# Altium PCB max17320g_2.PcbDoc
Units mil, origin at the board's own origin, x right, y up, seen from the top; angles counter-clockwise.
Board outline 2362.2 x 1166.1 mil, 2 copper layers (Top Layer, Bottom Layer); 58 components, 39 nets, 159 pads, 302 vias.
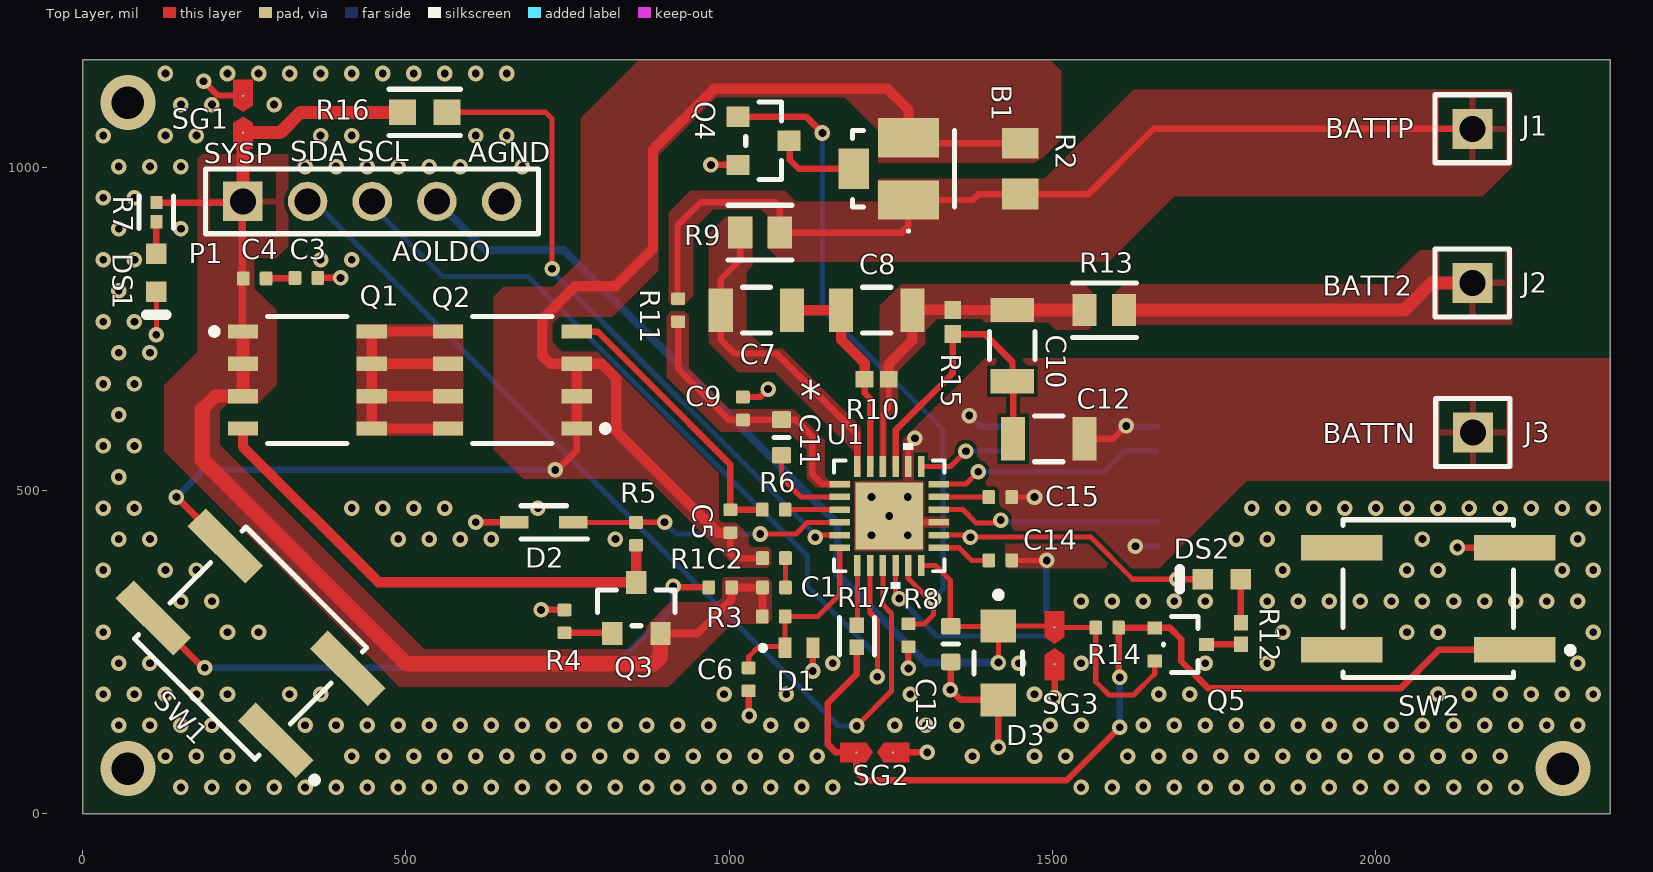
[diagram p0: Top Layer view]
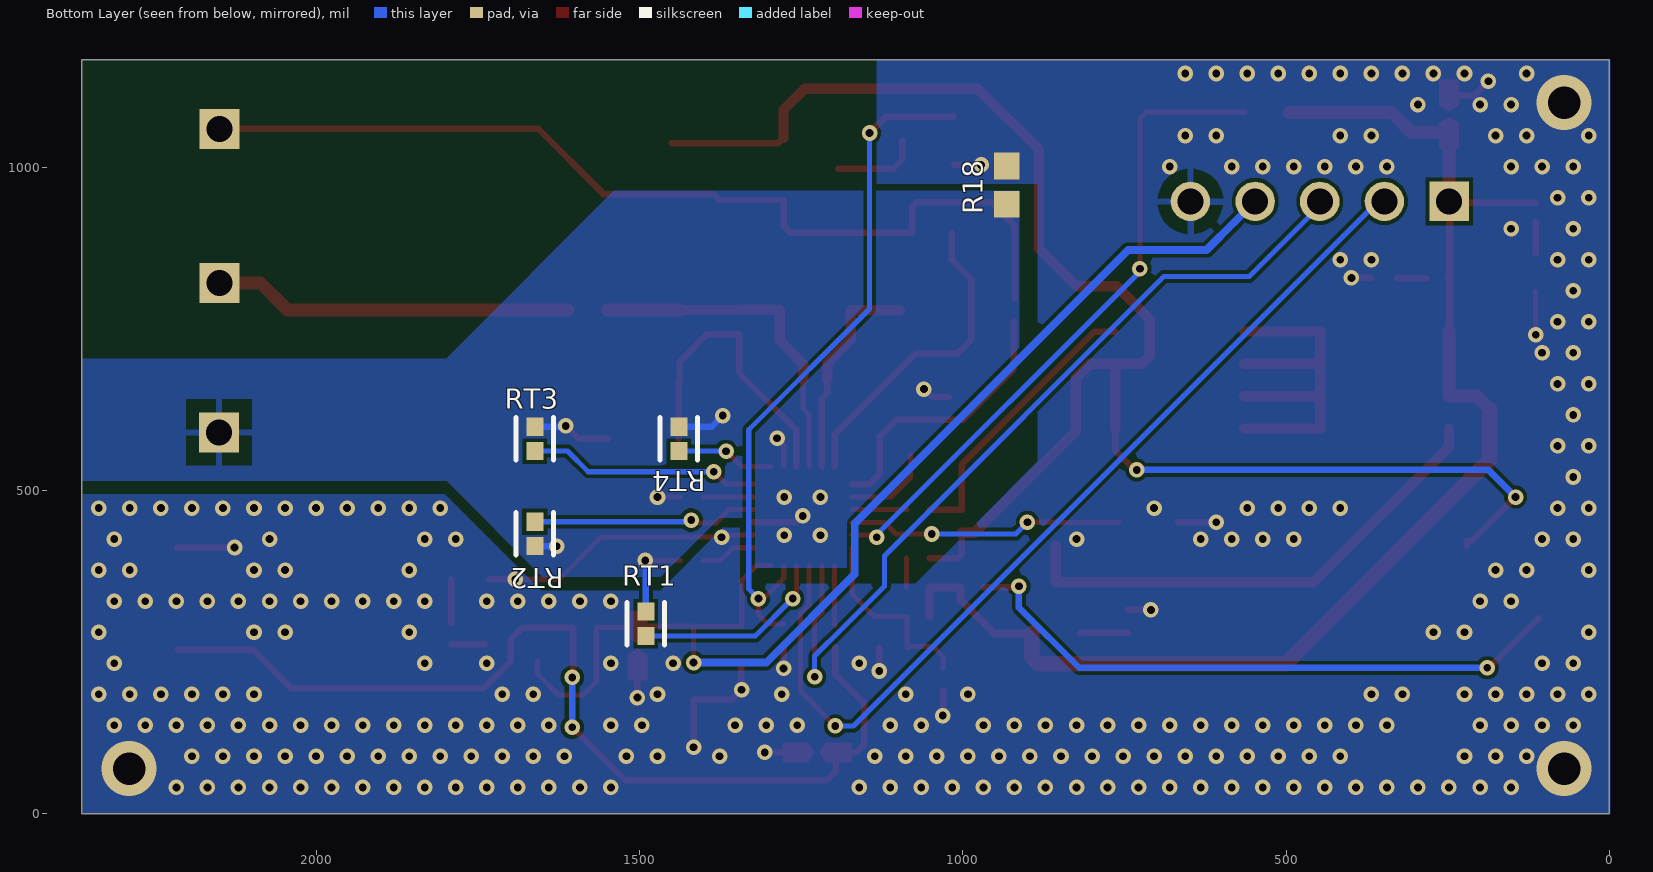
[diagram p1: Bottom Layer view, seen from below]
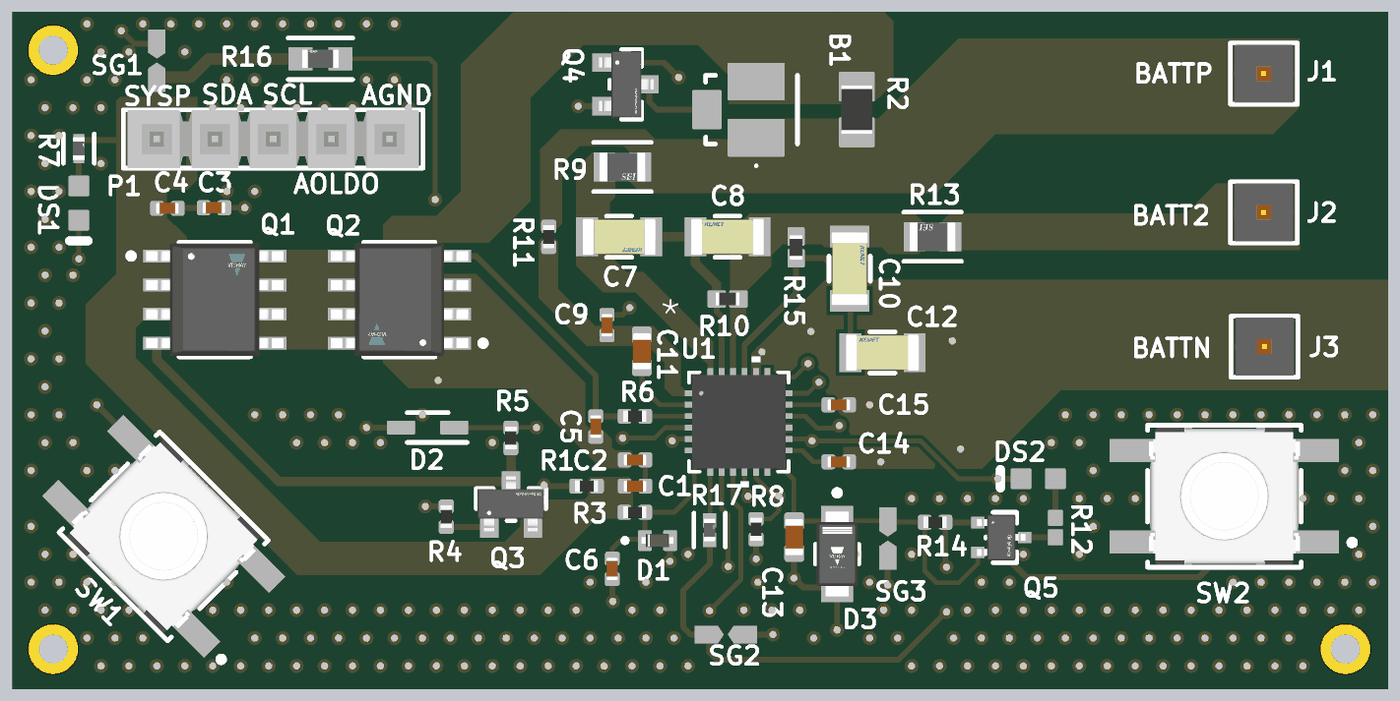
[diagram p2: 3D render of the assembled board from above, using the file's embedded part models]
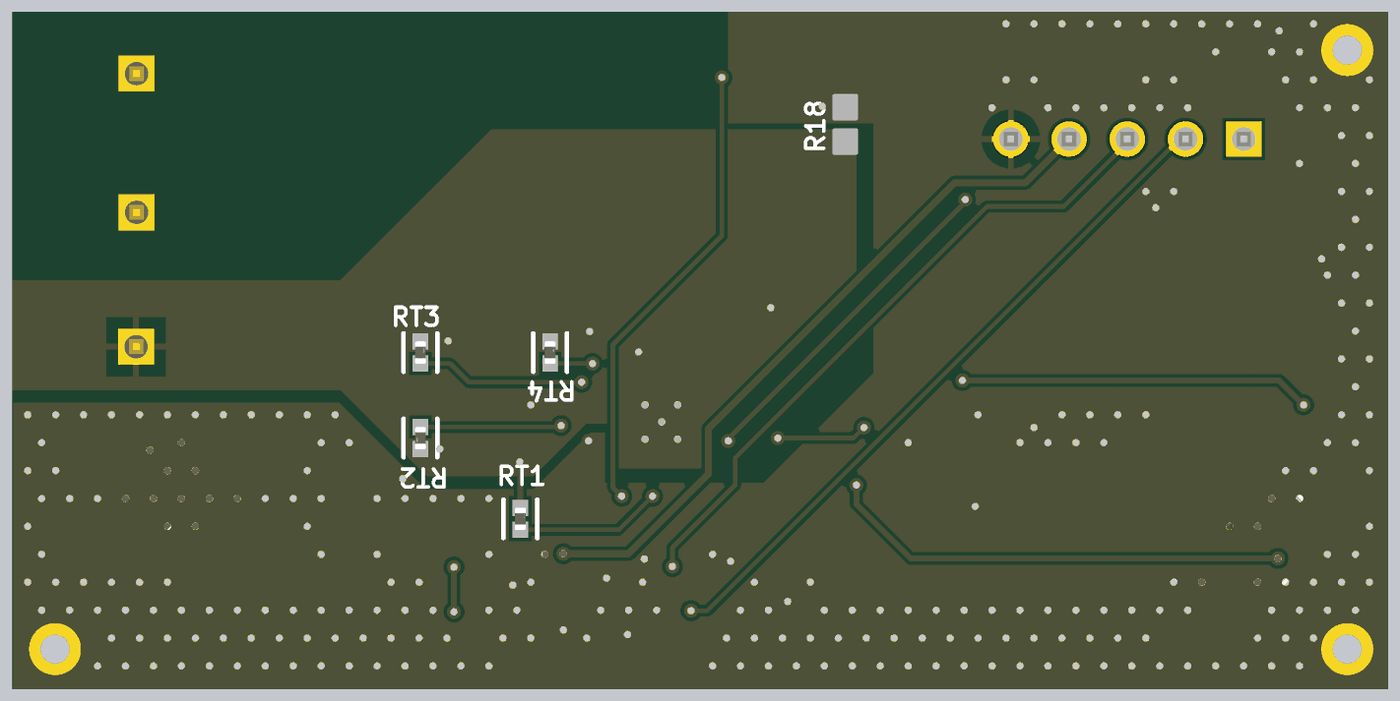
[diagram p3: 3D render of the assembled board from below, using the file's embedded part models]

## Layer stack, top to bottom
Top Solder: solder mask 0.4, Solder Resist, Dk 3.5
Top Layer: signal copper 1.4
Dielectric 1: dielectric 12.6, FR-4, Dk 4.8
Bottom Layer: signal copper 1.4
Bottom Solder: solder mask 0.4, Solder Resist, Dk 3.5

## Board outline
0,0 2362.2,0 2362.2,1166.1 0,1166.1

## Design rules (kind name [scope] priority, off if disabled: settings)
Clearance [All] p1: gap=6 ignorepadtopadclearanceinfootprint=TRUE
HoleSize [All] p1: absolutevalues=TRUE maxlimit=100 minlimit=10 maxpercent=80.000 minpercent=20.000
HoleToHoleClearance [All] p1: gap=12 allowstackedmicrovias=TRUE
MinimumSolderMaskSliver [All] p1: minsoldermaskwidth=5
PasteMaskExpansion [All] p1: expansion=2
PlaneClearance [All] p1: clearance=0
PlaneConnect [All] p1: planeconnectstyle=Direct reliefexpansion=20 reliefentries=4 reliefconductorwidth=10 reliefairgap=10
PolygonConnect [All] p1: thpad.connectstyle=Relief thpad.reliefconductorwidth=10 thpad.reliefentries=4 thpad.polygonreliefangle="90 Angle" thpad.airgapwidth=20 smdpad.connectstyle=Direct smdpad.reliefconductorwidth=10 smdpad.reliefentries=4 smdpad.polygonreliefangle="90 Angle" smdpad.airgapwidth=20 via.connectstyle=Direct via.reliefconductorwidth=10 via.reliefentries=4 via.polygonreliefangle="90 Angle" via.airgapwidth=20
RoutingCorners [All] p1: cornerstyle=45-Degree minsetback=6 maxsetback=6
RoutingVias [All] p1: holewidth=12 width=24 viastyle="Through Hole" minholewidth=12 minwidth=24 maxholewidth=200 maxwidth=500
SilkToSilkClearance [All] p1: silktosilkclearance=1
SolderMaskExpansion [All] p1: expansion=2 istentingtop=FALSE
SupplyNets "Schematic Supply Nets_1" [InNet('AGND')] p1: voltage=0.000
SupplyNets "Schematic Supply Nets_4" [InNet('BATTN')] p2: voltage=0.000
UnRoutedNet [All] p1: checkbadconnections=TRUE
UnpouredPolygon [All] p1: allowunpoured=TRUE allowshelved=TRUE
Width [All] p1: maxlimit=50 minlimit=8 preferedwidth=8
20 further rules are at their usual default settings.

## Components (designator, comment, footprint, x,y, rotation, side; value= is the part's Value field where it differs from the comment)
B1 "ITV4030L0812NR" ITV4030L0812NR 1277.12,997.61 r0 top
C1 "Capacitor 100nF +/-20% 25V 0402" CAPC0402(1005)60_L 1069.12,350.21 r0 top value="100nF 25V"
C2 "Capacitor 100nF +/-20% 25V 0402" CAPC0402(1005)60_L 1069.11,395.49 r180 top value="100nF 25V"
C3 "Capacitor 100nF +/-20% 25V 0402" CAPC0402(1005)60_L 346,829 r180 top value="100nF 25V"
C4 "Capacitor 100nF +/-20% 25V 0402" CAPC0402(1005)60_L 266,828 r180 top value="100n 25V"
C5 "Capacitor 100nF +/-20% 10V 0402" CAPC0402(1005)60_L 1001.65,452.71 r270 top value="100nF 10V"
C6 "Capacitor 10nF +/-20% 50V 0402" CAPC0402(1005)60_L 1030,208 r90 top value="10nF 50V"
C7 "0.01uF" FP-C1206C-EB-MFG 1041.83,779 r180 top value="10,000 pF"
C8 "0.01uF" FP-C1206C-EB-MFG 1228,779 r0 top value="10,000 pF"
C9 "Capacitor 100nF +/-20% 25V 0402" CAPC0402(1005)60_L 1021,627 r90 top value=100nF
C10 "0.01uF" FP-C1206C-EB-MFG 1437.62,724.24 r270 top value="10,000 pF"
C11 "Capacitor 470nF +/-20% 25V 0603" CAPC0603(1608)100_L 1080.85,582.21 r270 top value=470nF
C12 "0.01uF" FP-C1206C-EB-MFG 1494,580 r0 top value="10,000 pF"
C13 "Capacitor 470nF +/-20% 25V 0603" CAPC0603(1608)100_L 1342.47,262.65 r270 top value=470nF
C14 "Capacitor 470nF +/-40% 10V 0402" CAPC0402(1005)60_L 1419,392 r0 top value=470nF
C15 "Capacitor 470nF +/-40% 10V 0402" CAPC0402(1005)60_L 1419,490 r0 top value=470nF
D1 "RB520G-30_RLG" DIO_RB520G-30_RLG 1107.76,256.74 r0 top
D2 "SD101BWS-E3-18" SOD2713X115N 713,451 r180 top
D3 "BZD27C5V6P-E3-08" FP-S8-V-3915_01-001-MFG 1416.13,233.43 r90 top
DS1 "HSMG-C190" AVAG-HSMX-C190_V 114,837 r270 top
DS2 "LTST-C190KRKT" LTST-C191KRKT_V 1761.47,363 r180 top
J1 "TSW-101-07-L-S" FP-TSW-101-07-L-S-MFG 2149.02,1059.53 r0 top
J2 "TSW-101-07-L-S" FP-TSW-101-07-L-S-MFG 2149,821 r0 top
J3 "TSW-101-07-L-S" FP-TSW-101-07-L-S-MFG 2150,590 r0 top
P1 "TSW-105-05-L-S" SMTC-TSW-105-05-X-S 247.78,947.12 r0 top
Q1 "SI4420BDY-T1-E3" FP-C-06527-MFG 347.41,671 r0 top
Q2 "SI4420BDY-T1-E3" FP-C-06527-MFG 664.5,671 r180 top
Q3 "2N7002K" FP-318-08-MFG 856.19,318.49 r90 top
Q4 "2N7002K" FP-318-08-MFG 1053,1041 r0 top
Q5 "BSS223PWH6327XTSA1" FP-PG-SOT323-3-MFG 1698,262 r0 top
R1 "Resistor 1K +/-5 % 0402 63 mW" RESC0402(1005)_L 985.9,350.21 r0 top value=1k
R2 "Resistor 0R +/- 5% 0805 125 mW" RESC2013X60X35ML10T20 1450,998 r270 top locked value=0
R3 "Resistor 1K +/-5 % 0402 63 mW" RESC0402(1005)_L 1068.85,305.28 r0 top value=1k
R4 "Resistor 10K  +/-1 % 0402 63 mW" RESC0402(1005)_L 745,297.72 r270 top value=10k
R5 "Resistor 100R +/-1 % 0402 63 mW" RESC0402(1005)_L 856,433 r270 top value=100
R6 "Resistor 100R +/-1 % 0402 63 mW" RESC0402(1005)_L 1068.85,470.43 r0 top value=100
R7 "AC0402FR-07680KL" FP-AC0402-IPC_C 114,930.57 r90 top
R8 "Resistor 10K  +/-1 % 0402 63 mW" RESC0402(1005)_L 1277.12,276.21 r90 top value=10k
R9 "49.9Ω" FP-RMCF0805-IPC_C 1047.46,899 r0 top
R10 "Resistor 0R 0402 63 mW" RESC1005X40X25ML05T10 1228,672 r0 top value=0
R11 "Resistor 10R  +/-1 % 0402 63 mW" RESC0402(1005)_L 920.9,779 r90 top value=10
R12 "365Ω" RESC1005X40X25NL05T10 1791,279 r270 top
R13 "49.9Ω" FP-RMCF0805-IPC_C 1580,779 r180 top
R14 "Resistor 100K +/-1 % 0402 63 mW" RESC0402(1005)_L 1584.37,288.14 r180 top value=100k
R15 "Resistor 0R 0402 63 mW" RESC1005X40X25ML05T10 1345.63,760.76 r90 top value=0
R16 "AC0603FR-10330RL" FP-AC0603-IPC_A 528.95,1085 r180 top
R17 "150Ω" FP-AF0402-IPC_B 1197.31,274.75 r90 top
R18 "0.005" RESC1608X80N 932.13,972.37 r270 bottom
RT1 "NCU15XH103E6SRC" FP-NCP15-NCU15-0_05-IPC_A 1490,294 r90 bottom
RT2 "NCU15XH103E6SRC" FP-NCP15-NCU15-0_05-IPC_A 1661.57,433 r270 bottom
RT3 "NCU15XH103E6SRC" FP-NCP15-NCU15-0_05-IPC_A 1661.57,580 r90 bottom
RT4 "NCU15XH103E6SRC" FP-NCP15-NCU15-0_05-IPC_A 1438.88,580 r90 bottom
SG1 "SPARK GAP" EVKIT_SPARK_GAP 248,1082 r270 top
SG2 "SPARK GAP" EVKIT_SPARK_GAP 1225,95 r180 top
SG3 "SPARK GAP" EVKIT_SPARK_GAP 1503,260 r90 top
SW1 "EVQ-Q2K03W" FP-EVQ-Q2K03W-MFG 259.67,263.97 r135 top
SW2 "EVQ-Q2K03W" FP-EVQ-Q2K03W-MFG 2081.11,332.87 r180 top
U1 "MAX17320G20+" 21-0139I_T2444-4_MXM 1247.35,460.74 r0 top

## Footprints (in the part's own frame and the unit in brackets; to place one, negate y for a bottom-side part, rotate by r counter-clockwise, add the part's x,y. Pads: shape width x height; smd on the part's side, far side on the other; paste and mask are expansions set on the pad)
21-0139I_T2444-4_MXM [mil]
  rect 32x10 smd paste+0 mask+0: 1(-76.5,49.21) 2(-76.5,29.53) 3(-76.5,9.84) 4(-76.5,-9.84) 5(-76.5,-29.53) 6(-76.5,-49.21) 13(76.5,-49.21) 14(76.5,-29.53) 15(76.5,-9.84) 16(76.5,9.84) 17(76.5,29.53) 18(76.5,49.21)
  rect 10x32 smd paste+0 mask+0: 7(-49.21,-76.5) 8(-29.53,-76.5) 9(-9.84,-76.5) 10(9.84,-76.5) 11(29.53,-76.5) 12(49.21,-76.5) 19(49.21,76.5) 20(29.53,76.5) 21(9.84,76.5) 22(-9.84,76.5) 23(-29.53,76.5) 24(-49.21,76.5)
  rect 104x104 smd mask+0: 25(0,0)
  silkscreen extent -86,-112 86,112, body extent -81,-81 81,81, height 32
AVAG-HSMX-C190_V [mm] "SMD, 2-Leads, Body 1.6x0.8mm, Height 0.9mm"
  rect 0.8x0.8 smd: 1(-0.75,0) 2(0.75,0)
  silkscreen extent 1.65,-0.4 1.65,0.4, body extent -0.8,-0.4 0.8,0.4, height 0.9
CAPC0402(1005)60_L [mm] "Chip Capacitor, Body 1.0x0.5mm, Height 0.6mm, IPC High Density"
  rrect25% 0.5x0.55 smd: 1(-0.45,0) 2(0.45,0)
  body extent -0.5,-0.25 0.5,0.25, height 0.6
CAPC0603(1608)100_L [mm] "Chip Capacitor, Body 1.6x0.8mm, Height 1.0mm, IPC High Density"
  rrect25% 0.66x0.76 smd: 1(-0.7,0) 2(0.7,0)
  silkscreen extent 0,-0.3 0,0.3, body extent -0.8,-0.4 0.8,0.4, height 0.95
DIO_RB520G-30_RLG [mm]
  rect 0.5x0.8 smd: A(0.55,0) C(-0.55,0)
  silkscreen extent -1.52,-0.1 -1.32,0.1, body extent -0.7,-0.3 0.7,0.3, height 0.63
EVKIT_SPARK_GAP [mil]
  round 3 smd paste-1.5 mask-1.5: 1(-28.5,0) 2(28.5,0)
  Top Layer region: -13.5,-15 -53.5,-15 -53.5,15 -13.5,15 -3.5,0
  Top Layer region: 13.5,15 53.5,15 53.5,-15 13.5,-15 3.5,0
FP-318-08-MFG [mm]
  rect 0.9x0.8 smd paste+0 mask+0: 1(-1,0.95) 2(-1,-0.95) 3(1,0)
  silkscreen extent -0.7,-1.52 0.7,1.52, body extent -1.55,-1.62 1.55,1.62, height 0.25
FP-AC0402-IPC_C [mil]
  rect 20.29x18.6 smd paste+0 mask+0: 1(-14.9,0) 2(14.9,0)
  silkscreen extent -25,-27 25,27, body extent -29,-15 29,15, height 10
FP-AC0603-IPC_A [mil]
  rect 41.68x39.85 smd paste+0 mask+0: 1(-34.52,0) 2(34.52,0)
  silkscreen extent -55,-36 55,36, body extent -75,-40 75,40, height 10
FP-AF0402-IPC_B [mil]
  rect 24.23x22.54 smd paste+0 mask+0: 1(-16.87,0) 2(16.87,0)
  silkscreen extent -29,-27 29,27, body extent -35,-17 35,17, height 10
FP-C1206C-EB-MFG [mm]
  rect 0.95x1.7 smd paste+0 mask+0: 1(-1.4,0) 2(1.4,0)
  silkscreen extent -0.55,-0.9 0.55,0.9, body extent -2,-1 2,1, height 0.25
FP-C-06527-MFG [mil]
  rect 47x22 smd paste+0 mask+0: 1(-99.5,75) 2(-99.5,25) 3(-99.5,-25) 4(-99.5,-75) 5(99.5,-75) 6(99.5,-25) 7(99.5,25) 8(99.5,75)
  silkscreen extent -149,-98 61,98, body extent -127,-102 127,102, height 10
FP-EVQ-Q2K03W-MFG [mm]
  rect 3.2x1 smd paste+0 mask+0: A(-3.4,2) A'(3.4,2) B(-3.4,-2) B'(3.4,-2)
  silkscreen extent -5.7,-3.1 3.35,3.1, body extent -5.1,-3.2 5.1,3.2, height 0.25
FP-NCP15-NCU15-0_05-IPC_A [mil]
  rect 28.16x26.48 smd paste+0 mask+0: 1(-18.84,0) 2(18.84,0)
  silkscreen extent -33,-29 33,29, body extent -20,-10 20,10, height 22
FP-PG-SOT323-3-MFG [mm]
  rect 0.58x0.5 smd paste+0 mask+0: 1(-1.02,0.65) 2(-1.02,-0.65) 3(1.02,0)
  silkscreen extent -0.67,-1.1 0.67,1.1, body extent -1.41,-1.4 1.41,1.4, height 0.25
FP-RMCF0805-IPC_C [mil]
  rect 37.58x49.69 smd paste+0 mask+0: 1(-30.54,0) 2(30.54,0)
  silkscreen extent -49,-42 49,42, body extent -53,-31 53,31, height 10
FP-S8-V-3915_01-001-MFG [mm]
  rect 1.3x1.4 smd paste+0 mask+0: 1(-1.45,0) 2(1.45,0)
  silkscreen extent -0.43,-0.95 2.8,0.95, body extent -2.2,-1.05 2.2,1.05, height 0.25
FP-TSW-101-07-L-S-MFG [mm]
  rect 1.57x1.57 hole 1.02 paste-2539.97 mask+0: 1(0,0)
  silkscreen extent -1.46,-1.34 1.46,1.34, body extent -1.56,-1.44 1.56,1.44, height 0.25
ITV4030L0812NR [mm]
  rect 2.4x1.55 smd: 1(0,-1.225) 3(0,1.225)
  rect 1.2x1.6 smd: 2(-2.15,0)
  silkscreen extent -2.2,-2.5 1.8,1.5
LTST-C191KRKT_V [mm] "SMD, 2-Leads, Body 1.6x0.8mm"
  rect 0.8x0.8 smd: 1(-0.75,0) 2(0.75,0)
  silkscreen extent 1.65,-0.4 1.65,0.4, body extent -0.8,-0.4 0.8,0.4, height 0.9
RESC0402(1005)_L [mm] "Chip Resistor, Body 1.0x0.5mm, IPC High Density"
  rrect25% 0.5x0.55 smd: 1(-0.45,0) 2(0.45,0)
  body extent -0.5,-0.25 0.5,0.25, height 0.3
RESC1005X40X25ML05T10 [mm] "Chip Resistor, 2-Leads, Body 1.05x0.55mm, IPC Low Density"
  rect 0.7x0.65 smd: 1(-0.475,0) 2(0.475,0)
  body extent -0.53,-0.28 0.53,0.28, height 0.4
RESC1005X40X25NL05T10 [mm] "Chip Resistor, 2-Leads, Body 1.00x0.50mm, IPC Medium Density"
  rect 0.6x0.55 smd: 1(-0.425,0) 2(0.425,0)
  body extent -0.53,-0.27 0.53,0.28, height 0.4
RESC1608X80N [mm]
  rect 1.05x1 smd: 1(-0.75,0) 2(0.75,0)
RESC2013X60X35ML10T20 [mm] "Chip Resistor, 2-Leads, Body 2.1x1.35mm, IPC Low Density"
  rect 1.2x1.45 smd: 1(-1,0) 2(1,0)
  body extent -1.05,-0.68 1.05,0.67, height 0.6
SMTC-TSW-105-05-X-S [mm] ".025 SQ Post Terminal Strip Assembly, 1x5 Pins, Vertical, 2.54mm Pitch, Male"
  rect 1.55x1.55 hole 1.02: 1(0,0)
  round 1.55 hole 1.02: 2(2.54,0) 3(5.08,0) 4(7.62,0) 5(10.16,0)
  silkscreen extent -1.46,-1.27 11.62,1.27, body extent -1.27,-1.27 11.43,1.27, height 5.21
SOD2713X115N [mm]
  rect 1.125x0.5 smd: 1(-1.162,0) 2(1.162,0)
  silkscreen extent -1.73,-0.65 0.89,0.65

## Part data
B1: library part CMP-024-000000-1, "Battery Management ITV 4.0*3.0MM 8V 12A", Manufacturer_Name=LITTELFUSE, Mouser Part Number=650-ITV4030L0812NR, Arrow Part Number=ITV4030L0812NR, Arrow Price/Stock=https://www.arrow.com/en/products/itv4030l0812nr/littelfuse?utm_currency=USD&region=nac, Datasheet Link=https://www.digikey.ph/en/products/detail/littelfuse-inc/ITV4030L0812NR/11618324?msockid=39f1ec84d77b6f4428b7f904d6676eed, Design Item ID=ITV4030L0812NR, Geometry.Height=0.9mm, Manufacturer_Part_Number=ITV4030L0812NR, Mouser Price/Stock=https://www.mouser.co.uk/ProductDetail/Littelfuse/ITV4030L0812NR?qs=vHuUswq2%252Bsyi6DFHI7u4jA%3D%3D, Source=ITV4030L0812NR.SchLib
C1 C2 C3 C4 C9: library part CMP-001-00065-4, "Chip Capacitor, 100nF +/-20%, 25V, 0402, Thickness 0.6 mm", Case/Package=0402, Max Operating Temperature=85°C, Min Operating Temperature=-55°C, Tolerance=10%, Voltage Rating=25V, Mounting Technology=SMT, Pins=2
C5: library part CMP-001-00061-3, "Chip Capacitor, 100nF +/-20%, 10V, 0402, Thickness 0.6 mm", Case/Package=0402, Max Operating Temperature=85°C, Min Operating Temperature=-55°C, Tolerance=20%, Voltage Rating=10V, Mounting Technology=SMT, Pins=2
C6: library part CMP-001-00069-3, "Chip Capacitor, 10nF +/-20%, 50V, 0402, Thickness 0.6 mm", Case/Package=0402, Max Operating Temperature=85°C, Min Operating Temperature=-55°C, Tolerance=5%, Voltage Rating=50V, Mounting Technology=SMT, Pins=2
C7 C8 C10 C12: library part CMP-03020-029284-1, "C1206 10,000 pF X8R 20.00% 10 V", Capacitance="10,000 pF", Manufacturer=KEMET, Manufacturer Part Number=C1206C103M8HACTU, Package=C1206C-EB, Temperature="-55°C to +150°C", Temperature Characteristic=X8R, Temperature Coefficient=15%, Temperature Range High=+150°C, Temperature Range Low=-55°C, Tolerance=0.2, Voltage Rating="10 V", Automotive=Yes, Automotive Grade="Grade 0", Category=Cap, ComponentLink2Description=Datasheet, ComponentLink2URL=https://content.kemet.com/datasheets/KEM_C1007_X8R_ULTRA_150C_SMD.pdf, Device Class L1="Passive Components", Device Class L2=Capacitors, Device Class L3="Ceramic Capacitors", Height=0.88mm, Ipc Land Pattern Name=CAPC320160X78, Lead Free=Yes, Material=Ceramic, Octopart=https://octopart.com/c1206c103m8hactu-kemet-88727734, RoHS=TRUE
C11 C13: library part CMP-001-00077-3, "Chip Capacitor, 470nF +/-20%, 25V, 0603, Thickness 1 mm", Case/Package=0603, Max Operating Temperature=85°C, Min Operating Temperature=-55°C, Tolerance=10%, Voltage Rating=25V, Mounting Technology=SMT, Pins=2
C14 C15: library part CMP-001-00060-4, "Chip Capacitor, 470nF +/-40%, 10V, 0402, Thickness 0.6 mm", Case/Package=0402, Max Operating Temperature=85°C, Min Operating Temperature=-55°C, Tolerance=20%, Voltage Rating=10V, Mounting Technology=SMT, Pins=2
D1: library part CMP-021-000000-1, "SOD-723F, 30V, 0.1A, Schottky Diode", Package="SOD-723F Taiwan Semiconductor", Check_prices=https://www.snapeda.com/parts/RB520G-30%20RLG/Taiwan+Semiconductor/view-part/?ref=eda, Component Type=Standard, Design Item ID=RB520G-30_RLG, MF="Taiwan Semiconductor", MP="RB520G-30 RLG", Pin Count=2, SnapEDA_Link=https://www.snapeda.com/parts/RB520G-30%20RLG/Taiwan+Semiconductor/view-part/?ref=snap, Source=RB520G-30_RLG.SchLib
D2: library part CMP-019-000000-1, "Schottky Diodes & Rectifiers 30mA 50Volt 2A IFSM", Manufacturer_Name=Vishay, Mouser Part Number=78-SD101BWS-E3-18, Datasheet Link=http://www.vishay.com/docs/85680/sd101aws.pdf, Design Item ID=SD101BWS-E3-18, Geometry.Height=1.15mm, Manufacturer_Part_Number=SD101BWS-E3-18, Mouser Price/Stock=https://www.mouser.co.uk/ProductDetail/Vishay-Semiconductors/SD101BWS-E3-18?qs=S660mHfF5o09vR8sqS5amQ%3D%3D, Source=SD101BWS-E3-18.SchLib
D3: library part CMP-02541-000005-1, "DIODE ZENER 5.6V 800MW DO219AB", Forward Current=0.2A, Manufacturer=Vishay, Max Junction Temp=+175°C, Max Reverse Leakage Current=10uA, Max Zener Voltage=6V, Nom Zener Voltage=5.6V, Package=S8-V-3915.01-001, Power Dissipation=800mW, Reverse Voltage=2V, Temperature="-65°C to +175°C", Temperature Range Low=-65°C, Automotive=No, Automotive Grade=NA, Category=Diode, ComponentLink2Description=Datasheet, ComponentLink2URL=http://www.vishay.com/docs/85153/bzd27series.pdf, Device Class L1="Discrete Semiconductors", Device Class L2=Diodes, Device Class L3="Zener Diodes", Digikey Description="DIODE ZENER 5.6V 800MW DO219AB", Height=1.08mm, Lead Free=Yes, Manufacturer Part Number=BZD27C5V6P-E3-08, Mouser Description="Diode Zener Single 5.6V 800mW 2-Pin DO-219AB T/R", Octopart=https://octopart.com/bzd27c5v6p-e3-08-vishay-30317385, RoHS=TRUE, Standoff Height=0mm, Temperature Range High=+175°C, Zener Impedance=2Ω
DS1: library part CMP-007-00013-2, "LED Uni-Color Green, 52 mW, 20 mA, -40 to 85 degC, 2-Pin SMD, RoHS, Tape and Reel", Case/Package=0603, Colour=Green, Forward Current=20mA, Forward Voltage=2.2V, Manufacturer=Avago, Max Operating Temperature=85°C, Min Operating Temperature=-40°C, Package Description="2-Pin Surface Mount Device, Body 1.6 x 0.8 mm, Height 0.9 mm", Package Quantity=4000, Package Reference=HSMX-C190, Power=52mW, Datasheet URL=http://docs.avagotech.com/docs/AV02-0551EN, Datasheet Version=Mar-12, Illumination Colour=Green, Lens Style=Diffused, Luminous Intensity=15mcd, Manufacturer URL=http://www.avagotech.com/, Mounting Technology=SM, Nominal Vf=2.2V, Packaging=TapeandReel, Pins=2, RoHS Compliant=True, Viewing Angle=170degrees
DS2: library part CMP-007-00024-2, "LED Uni-Color Red, 62.5 mW, 25 mA, -30 to 85 degC, 2-Pin SMD, RoHS, Tape and Reel", Case/Package=0603, Colour=Red, Forward Current=20mA, Forward Voltage=2V, Manufacturer=Lite-On, Max Operating Temperature=85°C, Min Operating Temperature=-55°C, Package Description="2-Pin Surface Mount Device, Body 1.6 x 0.8 mm", Package Quantity=3000, Package Reference=C191KRKT, Power=75mW, Datasheet URL=http://optoelectronics.liteon.com/upload/download/DS-22-99-0151/S_110_LTST-C190KRKT.pdf, Datasheet Version="Rev. F, 05/2013", Illumination Colour=Red, Lens Style=Diffused, Luminous Intensity=54mcd, Manufacturer URL=http://www.us.liteon.com/, Mounting Technology=SM, Nominal Vf=2V, Packaging=TapeandReel, Pins=2, RoHS Compliant=True, Viewing Angle=130degrees
J1 J2 J3: library part CMP-02766-001775-1, "CONN HEADER VERT 1POS", Color=Black, Flammability Rating="UL94 V-0", Max Current Rating=7.6A, Max Operating Temperature=125°C, Max Voltage Rating (AC)=550V, Min Operating Temperature=-55°C, Connector Type=Header, Contact Finish - Mating=GOLD, Contact Material=Bronze, Contact Mating Length=0.23inch, Contact Plating=Gold, Contact Shape=Square, Contact Type="Male Pin", Depth=2.54mm, Fastening Type=Pull, Gender=Male, Housing Color=Black, Housing Material=Polyester, Insulation Color=Black, Insulation Material=PBT, Lead Free="Lead Free", Length=2.54mm, Mount="Through Hole", Number of Contacts=1, Number of Positions=1, Number of Rows=1, Orientation=Straight, Packaging=Bulk, Radiation Hardening=No, Reach SVHC Compliant=Yes, RoHS Compliant=Yes, Series=TSW, Termination=Solder, Width=2.54mm
P1: library part CMP-1024-00366-1, "0.025\" SQ Post Header, Through-hole, Vertical, -55 to 125 degC, 2.54 mm Pitch, 5-Pin, Male, RoHS", Manufacturer=Samtec, Temperature Range="-55 to 125 degC", ComponentLink1Description="Manufacturer URL", ComponentLink1URL=http://www.samtec.com, ComponentLink2Description=Datasheet, ComponentLink2URL=http://www.samtec.com/documents/webfiles/pdf/TSW_TH.PDF, ComponentLink3Description="Package Specification", ComponentLink3URL=http://www.samtec.com/documents/webfiles/cpdf/TSW-XXX-XX-XXX-X-XX-XXX-MKT.pdf, DatasheetVersion=F-214, Mounting Technology=Through-hole, Orientation=Vertical, PackageDescription=".025[0.64] SQ. Post Terminal Strip Assembly", PackageReference=TSW-105-05-X-S, PackageVersion="DM, 8/1988", PartNumber=TSW-105-05-L-S, Pitch="2.54 mm", RoHS=True
Q1 Q2: library part CMP-00030-46514802-1, "SI4420BDY-T1-E3 Si4420BDY Series 30 V 9.5 A 8.5 mOhm Surface Mount N-Channel Mosfet - SOIC-8", Case/Package=SOIC, Continuous Drain Current (ID)=9.5A, Drain to Source Breakdown Voltage=30V, Drain to Source Resistance=7mΩ, Forward Voltage=750mV, Gate to Source Voltage (Vgs)=20V, Max Junction Temperature (Tj)=150°C, Max Power Dissipation=1.4W, Min Operating Temperature=-55°C, Resistance=8.5mΩ, Threshold Voltage=3V, Drain to Source Voltage (Vdss)=30V, Element Configuration=Single, Fall Time=12ns, Height=1.55mm, Lead Free="Lead Free", Length=5mm, Max Operating Temperature=150°C, Mount="Surface Mount", NexarPartId=46514802, Number of Channels=1, Number of Elements=1, Number of Pins=8, Power Dissipation=1.4W, Radiation Hardening=No, Rds On Max=8.5mΩ, REACH SVHC=Unknown, Rise Time=11ns, RoHS=Compliant, Schedule B="8541290080, 8541290080", Turn-Off Delay Time=40ns, Turn-On Delay Time=15ns, Weight=186.993455mg, Width=4mm
Q3 Q4: library part CMP-07173-000009-1, "MOSFET N-CH 60V 300MA SOT23", Continuous Drain Current=320mA, Drain to Source Breakdown Voltage=60V, Drain to Source Resistance=1.19Ω, Gate To Source Voltage=20V, Input Capacitace At Vds="24.5pF @ 20V", Manufacturer="ON Semiconductor", Max Forward Diode Voltage=1.2V, Max Junction Temp=+150°C, Package=318-08, Power Dissipation=300mW, Pulse Drain Current=5A, Temperature="-55°C to +150°C", Temperature Range Low=-55°C, Typ Forward Diode Voltage=0.8V, Automotive=No, Category=Trans, ComponentLink2Description=Datasheet, ComponentLink2URL=https://www.onsemi.com/pub/Collateral/2N7002K-D.pdf, Depletion Mode=False, Device Class L1="Discrete Semiconductors", Device Class L2=Transistors, Device Class L3=MOSFETs, Digikey Description="MOSFET N-CH 60V 300MA SOT23", Drain To Source Voltage=60V, Footprint Url=https://www.onsemi.com/pub/Collateral/318-08.PDF, Gate Charge At Vgs="0.7nC @ 4.5V", Height=1.11mm, Ipc Land Pattern Name=SOT95P240X100-3, Lead Free=Yes, Manufacturer Part Number=2N7002K, Mouser Description="N-Channel 60 V 2 Ohm SMT Enhancement Mode Field Effect Transistor SOT-23", Number of Channels=1, Number Of N Channels=1, Octopart=https://octopart.com/2n7002k-on+semiconductor-84408900, RoHS=TRUE, Rthja Max=417°C/W, Standoff Height=0.01mm, Temperature Range High=+150°C, Threshold Vgs Max=2.3V, Threshold Vgs Min=1V, Transconductance=0.53S, Turn Off Delay Time=55.8ns, Turn On Delay Time=12.2ns
Q5: library part CMP-32901-000184-1, "MOSFET P-CH 20V 390MA SOT-323", Case/Package=SOT-323, Continuous Drain Current (ID)=390mA, Drain to Source Resistance=2.1R, Drain to Source Voltage (Vdss)=-20V, Gate to Source Voltage (Vgs)=12V, Input Capacitance=56pF, Max Operating Temperature=150°C, Max Power Dissipation=250mW, Min Operating Temperature=-55°C, Threshold Voltage=-900mV, Element Configuration=Single, Halogen Free="Halogen Free", Height=0.8mm, Lead Free="Lead Free", Length=2mm, Max Dual Supply Voltage=-20V, Mount="Surface Mount", Number of Pins=3, Packaging="Tape and Reel", Rds On Max=1.2R, REACH SVHC="No SVHC", Rise Time=5ns, Turn-Off Delay Time=5.1ns, Turn-On Delay Time=3.8ns, Width=1.25mm
R1 R3: library part CMP-009-00157-3, "Chip Resistor, 1 kOhms, +/-5 %, 63 mW, -55 to 155 degC, 0402", Case/Package=0402, Max Operating Temperature=155°C, Min Operating Temperature=-55°C, Power=63mW, Tolerance=5%, Pins=2
R2: library part CMP-009-00007-5, "Chip Resistor, 0 Ohm, 0.125 W, -55 to 155 degC, 0805 (2012 Metric)", Case/Package=0805, Max Operating Temperature=155°C, Min Operating Temperature=-55°C, Power=125mW, Tolerance=5%, Voltage Rating=50V, Mounting Technology=SM, Pins=2, RoHS Compliant=True
R4 R8: library part CMP-009-00149-3, "Chip Resistor, 10 kOhms, +/-1 %, 63 mW, -55 to 125 degC, 0402", Case/Package=0402, Max Operating Temperature=155°C, Min Operating Temperature=-55°C, Power=63mW, Tolerance=1%, Pins=2
R5 R6: library part CMP-009-00167-3, "Chip Resistor, 100 Ohms, +/-1 %, 63 mW, -55 to 155 degC, 0402", Case/Package=0402, Max Operating Temperature=155°C, Min Operating Temperature=-55°C, Power=63mW, Tolerance=1%, Pins=2
R7: library part CMP-03412-014052-2, "RES 680kΩ ±1% 0.063W 0402", Case/Package=0402, Max Operating Temperature=155°C, Max Power Dissipation=63mW, Min Operating Temperature=-55°C, Resistance=680kR, Resistor Type="Thick Film", Temperature Coefficient=100ppm/°C, Tolerance=1%, Depth=0.5mm, Features="Moisture Resistant", Height=0.015inch, Length=0.039inch, Military Standard=Not, Number of Terminations=2, Packaging="Tape and Reel", RoHS Compliant=Yes, Series=AC, Width=0.02inch
R9 R13: library part CMP-26527-001980-1, "49.9Ω ±1% 0.125W 0805 Thick Film Chip Resistor AEC-Q200 compliant", Case/Package=0805, Max Operating Temperature=155°C, Max Power Dissipation=125mW, Min Operating Temperature=-55°C, Resistance=49.9R, Resistor Type="Thick Film", Temperature Coefficient=100ppm/°C, Tolerance=1%, Features="Automotive AEC-Q200", Height=0.026inch, Length=0.079inch, Number of Terminations=2, Packaging="Tape and Reel", RoHS Compliant=Yes, Series=RMCF, Width=0.049inch
R10 R15: library part CMP-009-00004-5, "Chip Resistor, 0 Ohm, 0.063 W, -55 to 155 degC, 0402 (1005 Metric)", Case/Package=0402, Max Operating Temperature=155°C, Min Operating Temperature=-55°C, Power=63mW, Voltage Rating=50V, Mounting Technology=SM, Pins=2, RoHS Compliant=True
R11: library part CMP-009-00152-3, "Chip Resistor, 10 Ohms, +/-1 %, 63 mW, -55 to 155 degC, 0402", Case/Package=0402, Max Operating Temperature=155°C, Min Operating Temperature=-55°C, Power=63mW, Tolerance=1%, Pins=2
R12: library part CMP-2002-07632-1, Manufacturer=Yageo, Part Number=RC0402FR-07365RL
R14: library part CMP-009-00168-3, "Chip Resistor, 100 kOhms, +/-1 %, 63 mW, -55 to 155 degC, 0402", Case/Package=0402, Max Operating Temperature=155°C, Min Operating Temperature=-55°C, Power=63mW, Tolerance=1%, Pins=2
R16: library part CMP-03412-032342-2, "RES 330Ω 1.00% 0.1W 0603", RoHS Compliant=Yes
R17: library part CMP-03412-049320-1, "Anti-Sulfurated Chip Resistors Automotive Grade 150Ω 5% 100ppm/°C 0402", Case/Package=0402, Max Operating Temperature=155°C, Max Power Dissipation=63mW, Min Operating Temperature=-55°C, Resistance=150R, Resistor Type="Thick Film", Temperature Coefficient=100ppm/°C, Tolerance=5%, Features="Moisture Resistant", Height=0.015inch, Length=0.039inch, Number of Terminations=2, Packaging="Tape and Reel", RoHS Compliant=Yes, Series=AF, Width=0.02inch
R18: library part CMP-013-000000-1, "TT ELECTRONICS / WELWYN - MFC0603-R005FT5 - CURRENT SENSE RES, 0R005, 1%, 500 MW", Manufacturer_Name="TT Electronics", Manufacturer_Part_Number=MFC0603-R005FT5, Mouser Part Number=756-MFC0603-R005FT5, Datasheet Link=https://componentsearchengine.com/Datasheets/1/MFC0603-R005FT5.pdf, Design Item ID=MFC0603-R005FT5, Geometry.Height=0.8mm, Mouser Price/Stock=https://www.mouser.com/Search/Refine.aspx?Keyword=756-MFC0603-R005FT5, Source=MFC0603-R005FT5.SchLib
RT1 RT2 RT3 RT4: library part CMP-06022-000214-2, "NTC Thermistor for Temperature Sensor, Automotive, 0402, 10kΩ, 3%, 0.1mA, 5V", RoHS Compliant=Yes
SG1 SG2 SG3: library part EK_SPARKGAP, "EVKIT SPARK GAP", Manufacturer=N/A, DRAWING=@MAX17320G_SOLDERDOWN_EVKIT_REVB.MAX17320G_SOLDERDOWN_EVKIT_REVB(SCH_1):PAGE2, MAXINV=N/A, MFG_PART_NUMBER="SPARK GAP", OriginalSymbolOrigin=(-100,50), PACK_TYPE=SMD, PCB Footprint_=EVKIT_SPARK_GAP, PHYS_PAGE=1, TEMP_RANGE=N/A, Tolerance=N/A, VER=1, VOLTAGE_RATING=N/A
SW1 SW2: library part CMP-05618-000015-1, "SWITCH TACTILE SPST-NO 0.02A 15V", Contact Current Rating=20mA, Contact Resistance=100mΩ, Manufacturer="Panasonic Electronic Components", Operating Force=1.3N, Package=0, Temperature="-40°C to +85°C", Temperature Range High=+85°C, Temperature Range Low=-40°C, Voltage Rating Dc=15V, Automotive=No, Category=Switch, ComponentLink2Description=Datasheet, ComponentLink2URL=https://industrial.panasonic.com/cdbs/www-data/pdf/ATK0000/ATK0000C360.pdf, Device Class L1=Electromechanical, Device Class L2=Switches, Device Class L3="Tactile Switches", Digikey Description="SWITCH TACTILE SPST-NO 0.02A 15V", Electromechanical Life=1000000Cycles, Height=3.3mm, Lead Free=Yes, Manufacturer Part Number=EVQ-Q2K03W, Mount="Surface Mount", Mouser Description="Tactile Switches 1.3NF 6.5x6.0x3.1mm", Octopart=https://octopart.com/evq-q2k03w-panasonic-1224370, RoHS=TRUE, Throw Configuration=SPST-NO
U1: library part CMP-007-000000-1, "2S-4S ModelGauge m5 EZ Fuel Gauge with Protector, Internal Self-Discharge Detection, and SHA-256 Authentication", Manufacturer_Name="Analog Devices Inc", Copyright="Copyright (C) 2025 Ultra Librarian. All rights reserved.", Design Item ID=MAX17320G20+, Manufacturer_Part_Number=MAX17320G20+, RefDes=RefDes, Source=MAX17320G20&plus_.SchLib, Type=Type

## Via types
v1: diameter 24, hole 12, Top Layer to Bottom Layer, tented both sides, 299 vias
v2: diameter 85, hole 50, Top Layer to Bottom Layer, 3 vias

## Nets (pads, with @x,y where several pads share a name; then routed paths per layer and width w, separated by ;. In a path a pad name is that pad's centre, name@x,y a point inside that pad or via, vN(x,y) a via of type N, cw(c..) or ccw(c..) an arc to the next point about the centre after c; other vN are vias at no path point)
AGND: C3.1 C6.1 C13.2 D1.A D2.2 D3.1 DS1.2 DS2.2 P1.5 Q4.2 R4.1 R8.1 R18.1 SG1.1 SG2.1 SG3.1 SW2.B U1.14 | length 1259.2
  Top Layer w8: v1(114,741) DS1.2 ; U1.14 1369.79,431.21 v1(1373,428) 1559,428 1624,363 v1(1692,363) ; v2@2282,72 2288,78 v2@2288,89
  Top Layer w10: v1(187,1133) 209,1111 245.65,1111 246.15,1110.5 SG1.1 ; C3.1@367.9,829 398.81,829 v1(398.9,828.91) ; v1(608,451) D2.2 ; P1.5 P1.5@648.11,947.44 ; v1(709,315.43) R4.1 ; v1(971.6,1003.6) Q4.2 ; C6.1 1030,153 v1(1031,152) ; v1(1129,221) 1129.42,221.42 D1.A ; SG2.1 v1(1306,95) ; v1(1277.12,225) R8.1 ; v1(1342,192) 1357.66,176.34 D3.1 v1(1416.13,103) ; v1@1342.47,192.47 C13.2 ; v1(1503,180) SG3.1 ; v1(1692,363) DS2.2 ; v1(2126,412) 2126.39,411.61 SW2.B
  other v1: 152,41 200,41 248,41 296,41 344,41 392,41 440,41 488,41 536,41 584,41 632,41 680,41 728,41 776,41 824,41 872,41 920,41 968,41 1016,41 1064,41 1112,41 1160,41 1544,41 1592,41 1640,41 1688,41 1736,41 1784,41 1832,41 1880,41 1928,41 1976,41 2024,41 2072,41 2120,41 2168,41 2216,41 128,89 176,89 224,89 416,89 464,89 512,89 560,89 608,89 656,89 704,89 752,89 800,89 848,89 896,89 944,89 992,89 1040,89 1088,89 1136,89 1376,89 1472,89 1520,89 1616,89 1664,89 1712,89 1760,89 1808,89 1856,89 1904,89 1952,89 2000,89 2048,89 2096,89 2144,89 2192,89 56,137 104,137 152,137 200,137 344,137 392,137 440,137 488,137 536,137 584,137 632,137 680,137 728,137 776,137 824,137 872,137 920,137 968,137 1064,137 1112,137 1256,137 1304,137 1352,137 1496,137 1544,137 1640,137 1688,137 1736,137 1784,137 1832,137 1880,137 1928,137 1976,137 2024,137 2072,137 2120,137 2168,137 2216,137 2264,137 2312,137 32,185 80,185 128,185 176,185 224,185 320,185 368,185 992,185 1088,185 1280,185 1472,185 1664,185 1712,185 2096,185 2144,185 2192,185 2240,185 2288,185 2336,185 56,233 104,233 1160,233 1448,233 1544,233 1736,233 1832,233 2312,233 32,281 224,281 272,281 1856,281 2048,281 2096,281 2336,281 152,329 200,329 1544,329 1592,329 1640,329 1688,329 1736,329 1832,329 1880,329 1928,329 1976,329 2024,329 2072,329 2120,329 2168,329 2216,329 2264,329 2312,329 32,377 128,377 176,377 1856,377 2048,377 2096,377 2288,377 2336,377 56,425 104,425 488,425 536,425 584,425 632,425 824,425 1784,425 1832,425 2072,425 2312,425 32,473 80,473 416,473 464,473 512,473 560,473 704,473 1808,473 1856,473 1904,473 1952,473 2000,473 2048,473 2096,473 2144,473 2192,473 2240,473 2288,473 2336,473 56,521 32,569 80,569 56,617 32,665 80,665 56,713 104,713 32,761 80,761 56,809 32,857 80,857 368,857 416,857 56,905 152,905 32,953 80,953 56,1001 104,1001 152,1001 344,1001 392,1001 440,1001 488,1001 536,1001 584,1001 680,1001 32,1049 128,1049 176,1049 368,1049 416,1049 608,1049 656,1049 152,1097 200,1097 296,1097 128,1145 224,1145 272,1145 320,1145 368,1145 416,1145 464,1145 512,1145 560,1145 608,1145 656,1145
  other v2: 70,70 2289,70 70,1100
ALRT: R17.2 U1.7 | length 93
  Top Layer w8: R17.2 1198.14,292.46 1198.14,328.86 U1.7
AOLDO: C13.1 D3.2 P1.4 Q5.2 R14.2 SG3.2 U1.12 | length 1833.7
  Top Layer w8: U1.12 1318.72,384.24 1341.73,361.23 C13.1@1341.73,290.21 ; C13.1 1342.69,289.99 1415.61,289.99 D3.2 ; v1(1416.13,234) D3.2 ; Q5.2 1657.84,216.84 1625,184 1587,184 1566.65,204.35 R14.2 1566.3,288.5 SG3.2 1500.98,290.52 D3.2
  Bottom Layer w12: P1.4 578.62,916.27 622.9,872 744,872 1167,449 1167,371 1304,234 v1(1416.13,234)
BATT2: J2.1 R13.1 | length 555.9
  Top Layer w20: R13.1 2044,779 2086,821 J2.1
BATTN: C9.2 C12.2 C14.2 C15.2 J3.1 R18.2 RT1.2 RT2.2 RT3.2 RT4.2 U1.15 U1.20 U1.25 | length 571.6
  Top Layer w8: U1.20 1276.88,570.88 v1(1287,581) ; C14.2 1456,392 v1(1491,392) ; C15.2 v1(1472,490)
  Top Layer w10: C9.2 1047.72,644.72 v1(1060,657) ; v1(1247.35,460.74) 1257.19,450.9 U1.15 ; C12.2 1594,580 v1(1614,600)
  Bottom Layer w10: v1(1371,616) 1388.16,598.84 RT4.2 ; RT1.2 1490,391 v1(1491,392) ; v1(1614,600) 1615.16,598.84 RT3.2 ; v1(1628,414) 1628.16,414.16 RT2.2
  other v1: 1220,431 1276,431 1220,490 1276,490
BATTP: B1.1 J1.1 R2.2 R9.2 R11.2 | length 1490.9
  Top Layer w10: R11.2@919.91,796.72 919.91,909.91 956,946 1072,946 1078,940 R9.2 1267,899 1277.12,909.12 B1.1 1376.38,949.38 1385.57,958.57 1449.95,958.57 R2.2 1450.05,958.57 1555.57,958.57 1656.53,1059.53 J1.1
BATTS: C7.2 R9.1 U1.24 | length 499.9
  Top Layer w10: R9.1 1016.91,856.91 986.71,826.71 C7.2 986.71,733.29 1008,712 1073,712 1198.14,586.86 U1.24
CELL1: C10.2 C12.1 R15.1 U1.21 | length 471
  Top Layer w10: U1.21 1257.19,593.19 1345.63,681.63 R15.1 1394.94,742.06 1438,699 1438,670.65 C10.2@1437.04,669.7 ; C10.2 1438.88,667.86 C12.1
CELL2: C8.2 C10.1 R10.2 R13.2 R15.2 U1.22 | length 526.6
  Top Layer w8: U1.22 1237.51,617.51 1246.7,626.7 R10.2
  Top Layer w16: R10.2 1246.7,695.7 1283.12,732.12 C8.2 ; C8.2@1283.58,779.46 R15.2 ; R15.2@1345.74,779.35 C10.1
  Top Layer w20: C10.1 1437.97,779 R13.2
CELL3: C7.1 C8.1 R10.1 U1.23 | length 336.3
  Top Layer w10: R10.1 1209.3,650.7 1217.82,642.18 U1.23
  Top Layer w16: C7.1 C8.1 1172.88,733.12 1209.3,696.7 R10.1
CHG: R6.2 U1.3 | length 84.4
  Top Layer w8: R6.2 1086.56,470.58 U1.3
CP: C11.2 U1.2 | length 136.7
  Top Layer w8: C11.2 1080.85,520.44 1111.02,490.27 U1.2
DIS: D2.1 R5.1 U1.4 | length 427.4
  Top Layer w8: D2.1 758.85,450.9 855.82,450.9 R5.1 856.28,451 v1(900,451) ; v1(1047.86,432.86) 1048,433 1103,433 1120.9,450.9 U1.4
  Bottom Layer w8: v1(900,451) 918,433 1047.86,433 v1(1047.86,432.86)
IN: C9.1 C11.1 R11.1 U1.1 | length 430.6
  Top Layer w10: R11.1 920.9,688.1 999.23,609.77 C9.1@1020.49,609.77 ; C9.1 1021.24,609.53 1080.6,609.53 C11.1 1102.23,609.77 1128,584 1128,526 1144.05,509.95 U1.1
NetB1_2: B1.2 Q4.3 | length 134.7
  Top Layer w10: Q4.3 1093.37,1040 1093.37,1011.63 1107.39,997.61 B1.2
NetB1_3: B1.3 C2.2 C5.2 Q2.1 Q2.2 Q2.3 R2.1 SW1.B' | length 2525.5
  Top Layer w10: v1(145,490) 212.7,422.3 220.7,422.3 SW1.B' ; v1(731,532) 734,532 764,562 Q2.1 ; C5.2 1001.65,401.35 1007.51,395.49 C2.2 ; B1.3 1285.64,1037.32 1449.95,1037.32 R2.1
  Top Layer w16: Q2.1 Q2.2 Q2.3 ; C5.2 982.01,434.99 825,592 825,674 803,696 Q2.3 ; B1.3 1277.12,1088.88 1244.32,1121.68 976.68,1121.68 882,1027 882,874 824,816 762,816 711,765 711,708.31 723.31,696 Q2.3
  Bottom Layer w10: v1(145,490) 187,532 v1(731,532)
NetC1_2: C1.2 C2.1 | length 45.3
  Top Layer w8: C1.2 C2.1
NetC3_2: C3.2 C4.1 | length 45
  Top Layer w10: C4.1 284.22,828.5 327.78,828.5 C3.2
NetC5_1: C5.1 Q2.4 R6.1 | length 442.2
  Top Layer w10: Q2.4 764.41,745.59 796.41,745.59 873,669 1001.65,540.35 C5.1 R6.1
NetDS1_1: DS1.1 R7.1 | length 49.1
  Top Layer w10: DS1.1 R7.1
NetDS2_1: DS2.1 R12.1 | length 67.3
  Top Layer w10: R12.1 DS2.1
NetQ1_4: Q1.4 Q3.3 R5.2 | length 780.2
  Top Layer w16: Q1.4 247.91,568.09 457.95,358.05 Q3.3@856,358.05 ; Q3.3 R5.2@856.19,415.09
NetQ1_5: Q1.5 Q1.6 Q1.7 Q1.8 Q2.5 Q2.6 Q2.7 Q2.8 | length 622.4
  Top Layer w16: Q2.8 Q1.5 Q1.6 ; Q2.7 Q1.6 ; Q2.6 Q1.7 ; Q2.5 Q1.8 Q1.7 ; Q1.6 Q1.7
NetQ3_1: Q3.1 R4.2 | length 74.2
  Top Layer w10: R4.2 817.91,280 Q3.1
NetQ4_1: Q4.1 R8.2 U1.11 | length 1089.7
  Top Layer w8: U1.11 1276.88,364.12 1312,329 v1(1316,333) 1316,308 1301.93,293.93 R8.2
  Top Layer w10: Q4.1 1118.6,1078.4 v1(1144,1053)
  Bottom Layer w8: v1(1144,1053) 1144,781 1331,594 1331,348 v1(1316,333)
NetQ5_1: Q5.1 R14.1 R17.1 SG2.2 SW2.A | length 1545.9
  Top Layer w10: R17.1 1197.31,216.31 1152,171 1152,108 1165,95 SG2.2 1196.5,65.5 1210,52 1522,52 v1(1604,134) ; R14.1 1602.09,212.91 v1(1604,211) ; R14.1@1602.64,287.59 Q5.1 1681.41,287.59 1699,270 1699,236 1741,194 2038,194 2098.13,254.13 SW2.A
  Bottom Layer w10: v1(1604,134) v1(1604,211)
NetQ5_3: Q5.3 R12.2 | length 52.6
  Top Layer w10: Q5.3@1738.43,262.27 R12.2
NetR1_1: R1.1 SW1.A' | length 963
  Top Layer w10: SW1.A' 186.29,226 v1(189,226) ; v1(913,352) 914.79,350.21 R1.1
  Bottom Layer w10: v1(189,226) 820,226 913,319 v1(913,352)
PCKP: C6.2 D1.C R3.2 U1.6 | length 300
  Top Layer w8: C6.2 1030,243 1045.72,258.72 1083.99,258.72 D1.C@1086.04,256.67 ; D1.C 1086.11,304.83 R3.2 1136.85,305.28 1170.85,339.27 U1.6
REG2: C15.1 U1.17 | length 77.5
  Top Layer w8: U1.17 1401.02,490.27 C15.1
REG3: C14.1 U1.13 | length 85.5
  Top Layer w8: U1.13 1355.47,411.53 1375,392 C14.1
SCL: P1.3 U1.8 | length 1312.9
  Top Layer w8: U1.8 1217.82,311.18 1229,300 v1(1229,212)
  Bottom Layer w8: P1.3 447.78,940.22 557,831 689,831 1121,399 1121,352 1184,289 1229,244 v1(1229,212)
SDA: P1.2 U1.9 | length 1461.4
  Top Layer w8: v1(1197,136) 1251,190 1251,202.89 1251,221.11 1251,310 1237.51,323.49 U1.9
  Bottom Layer w8: P1.2 357.88,947.12 1169,136 v1(1197,136)
SYSP: C1.1 C4.2 P1.1 Q1.1 Q1.2 Q1.3 Q3.2 R1.2 R3.1 R7.2 R16.2 SG1.2 | length 2074.8
  Top Layer w10: R7.2 246.14,945.48 246.77,946.11 P1.1 ; R3.1 R3.1@1051.27,305.42 ; C1.1@1051.13,350.21 C1.1@1051.27,350.08
  Top Layer w12: P1.1@246.77,946.11 246.77,829.51 C4.2 246.77,826.49 246.77,747.14 Q1.1 ; Q3.2 951.12,279.12 1003.62,331.62 R1.2 C1.1@1051.13,350.21 ; R3.1@1051.27,305.42 C1.1@1051.27,350.08
  Top Layer w20: 185,626 205,646 Q1.3 Q1.2 Q1.1 ; P1.1 247.78,1053.28 SG1.2 305.5,1053.5 337,1085 R16.2
  Top Layer w24: 185,626 185,548 501,232 883,232 893.59,242.59 Q3.2
TH1: RT1.1 U1.10 | length 304.6
  Top Layer w8: U1.10 1257.19,338.81 v1(1263,333)
  Bottom Layer w8: v1(1263,333) 1320.84,275.16 RT1.1
TH2: RT2.1 U1.16 | length 352
  Top Layer w8: U1.16 1361.42,470.58 1382,450 1419,450 1420,451 1420,453.81 1419.91,453.9 v1(1419.91,454.32)
  Bottom Layer w8: v1(1419.91,454.32) 1419.91,453.9 1420,453.81 1420,453.43 1420.84,452.59 1420.84,451.84 RT2.1
TH3: RT3.1 U1.18 | length 358.9
  Top Layer w8: U1.18 1365.95,509.95 v1(1385,529)
  Bottom Layer w8: v1(1385,529) 1579,529 1611.16,561.16 RT3.1
TH4: RT4.1 U1.19 | length 152.2
  Top Layer w8: U1.19 1342.24,537.24 v1(1366,561)
  Bottom Layer w8: v1(1366,561) 1366.16,561.16 RT4.1
ZVC: R16.1 U1.5 | length 1021.4
  Top Layer w8: R16.1 716,1085 726,1075 v1(726,843) ; v1(1133,428) 1136.21,431.21 U1.5
  Bottom Layer w8: v1(726,843) 726,839 1133,432 v1(1133,428)
pads on no net: SW1.A SW1.B SW2.A' SW2.B'

## Polygon pours and split planes (outlines as drawn)
BATTN on Bottom Layer "BATTN_L02_P020" (solid, remove dead copper, pour order 20): 1539.49,963.51 1799,704 2362.2,704 2362.2,515 1798,515 1650,367 1466.81,367 1375.91,457.91 1336.91,457.91 1336.91,380.91 912.44,380.91 912.44,963.51
AGND on Bottom Layer "AGND_L02_P015" (solid, remove dead copper, pour order 15): 2360.99,494.24 1800.78,494.24 1651.78,345.24 1467.78,345.24 1370.78,442.24 1344.78,442.24 1344.78,356 1073.02,356 883.78,545.24 883.78,974.24 1133,974.24 1133,1166.1 -1.22,1166.1 -1.22,0 2360.99,0
BATT2 on Top Layer "NONET_L-01_P-001" (solid, pour order 21): 1596.98,756.29 1596.98,806.29 1609.98,819.29 2015.39,819.29 2067.39,871.29 2210.98,871.29 2210.98,756.29
BATTN on Top Layer "BATTN_L01_P018" (solid, remove dead copper, pour order 18): 1431.49,380 1431.46,379.97 1427.02,379.97 1427.02,415.02 1427.02,420.98 1390,458 1346,457 1340,457 1340,380 1193.14,380 1193.14,515.2 1267.8,515.2 1268,515 1268,578 1395,705 2362.2,705 2362.2,515.2 1800.2,515.2 1665,380
BATTP on Top Layer "BATTP_L01_P012" (solid, remove dead copper, pour order 12): 1059.21,874.79 1081,854 1587,854 1688,955 2165,955 2211,1001 2211,1120 1625,1120 1487.2,982.2 1232.18,982.2 1229.88,979.89 1229.88,947 1103,947 1086,964 940,964 906,930 906,792.39 911.51,786.87 929.87,786.87 944,801 944,904 975,935 1049,935 1059.21,924.79
NetB1_3 on Top Layer "NONET_L-01_P-001" (solid, pour order 33): 681,518 636,563 636,800 651,815 728,815 770,857 770,1076 859,1165 1497,1165 1513,1149 1513,1043.23 1483.83,1014.29 1471.8,1007 1230,1007 1230,1056.49 1178.49,1108 980,1108 890,1018 890,840 819,769 737,769 726,758 726,730 741,715 796,715 984,527 984,456 990,450 1011,450 1029,432 1029,418 1035,412 1061,412 1065,408 1065,383 1062,380 1011.6,380.4 874,518
CELL2 on Top Layer "CELL2_L01_P016" (solid, remove dead copper, pour order 16): 1232.51,521.31 1232.57,521.24 1242.47,521.24 1242.47,608.47 1260.48,626.48 1260.48,684.48 1303,727 1303,747 1321.68,765.68 1390.32,765.68 1395.35,760.65 1493.35,760.65 1505,749 1555,749 1562,756 1562,806 1549,819 1266,819 1232.57,785.57 1232.57,553.31 1232.51,553.24 1232.51,521.77
NetQ1_5 on Top Layer "NONET_L-01_P-001" (solid, pour order 26): 423.41,757 423.88,756.53 423.88,585 588.5,585 588.5,757
SYSP on Top Layer "SYSP_L01_P014" (solid, remove dead copper, pour order 14): 318,878 300,860 270,860 265,855 265,812 300,779 300,663.59 271.41,635 224.41,635 212,622.59 212,571 528,255 846,255 872,281 872,290.99 908.01,327 981,327 989,335 989,363 992,366 1059,366 1066,359 1066,301 1059.45,294.45 1043.75,294.45 1003.45,294.45 906,197 490,197 126,561 126,663 178,715 178,1013 185,1020 318,1020
IN on Top Layer "IN_L01_P013" (solid, remove dead copper, pour order 13): 903,770 910,777 930,777 937,770 937,690 1001,626 1100,626 1148,578 1148,521.8 1154.85,514.95 1186.85,514.95 1186.85,504.95 1134.05,504.95 1120,519 1120,563 1092,591 987,591 903,675
BATTS on Top Layer "BATTS_L01_P017" (solid, remove dead copper, pour order 17): 1193.14,521.24 1203.14,521.24 1203.14,598.86 1083,719 1055,719 1026,748 1026,838 1035.71,847.71 1035.71,923.85 994.85,923.85 968.01,897.01 968.01,728.99 1014,683 1070,683 1193.14,559.86 1193.14,548.57

## Silkscreen, mask and mechanical layers (free items; w line width, h text height)
Top Overlay:
  text "BATTP" at 1922,1045 h31
  text "SDA" at 321,1009 h31
  text "SCL" at 425,1009 h31
  text "AGND" at 596,1008 h31
  text "SYSP" at 187,1006 h31
  text "AOLDO" at 479,855 h31
  text "BATT2" at 1918,801 h31
  text "BATTN" at 1918,573 h31
Mechanical 1:
  lines w47.24: 55,0 2295,0 ; 0,0 2362.2,0 2362.2,1166.1 0,1166.1 0,0

## Text inside footprints (layer, text, board x,y; h text height)
U1: Top Overlay "*" at 1109,620 h50; Top Assembly "*" at 1174.35,494.8 h50